# Altium PCB DM0249.PcbDoc (part 2 of 2)
Units mm, origin at the board's own origin, x right, y up, seen from the top; angles counter-clockwise.
Board outline 25 x 23.86 mm, 4 copper layers (Top Copper, Signal Layer 1, Layer 1, Bottom Layer), stack 1.602 mm thick; 50 components, 26 nets, 168 pads, 81 vias.
Unrouted connection lines stored in the file: 43.
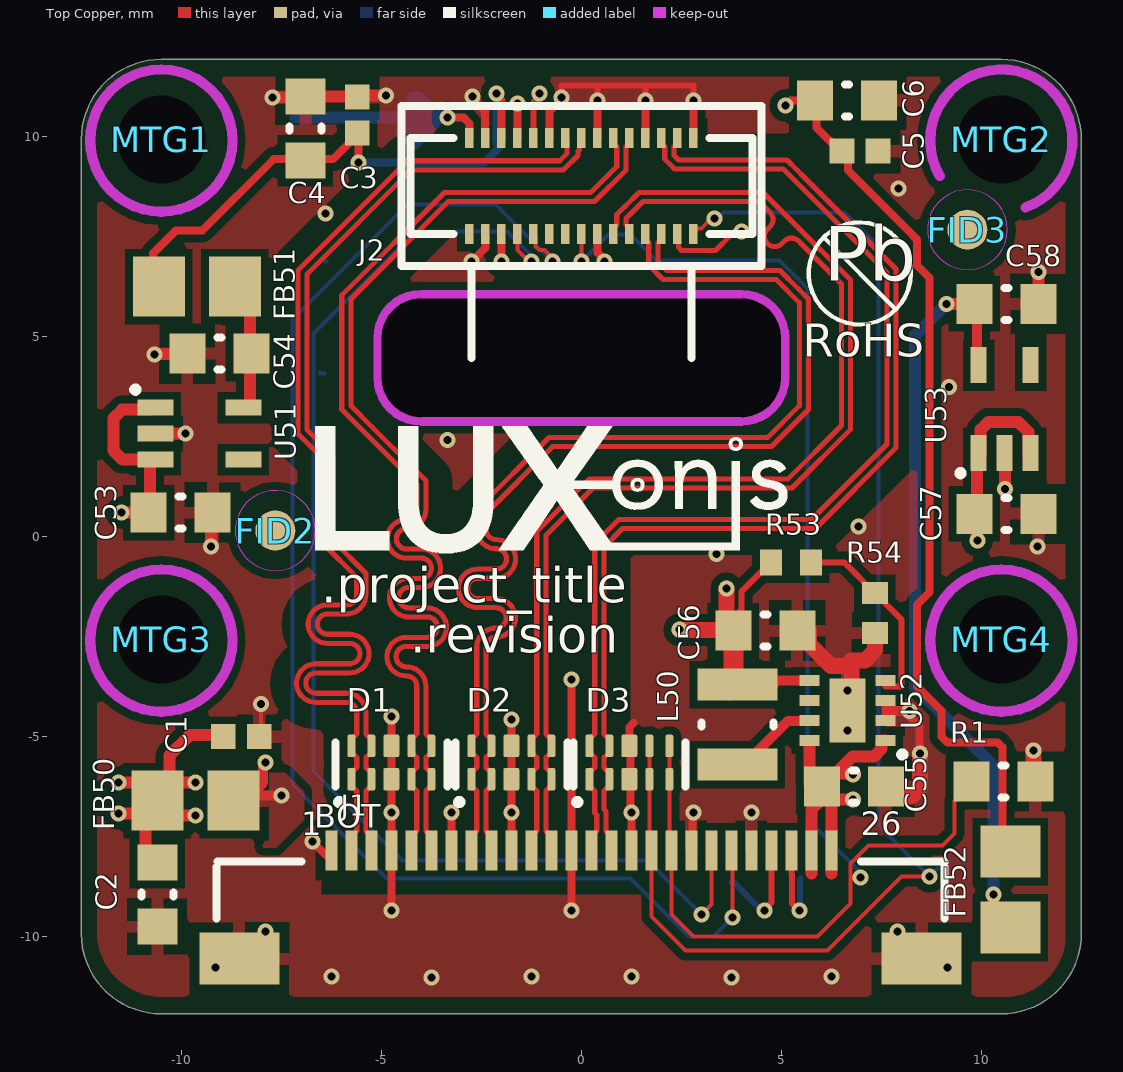
[diagram p0: Top Copper view]

## Via types
v1: diameter 0.4, hole 0.2, Top Copper to Bottom Layer, tented both sides, 79 vias
v2: diameter 0.3, hole 0.203, Top Copper to Bottom Layer, 2 vias

## Nets (pads, with @x,y where several pads share a name; then routed paths per layer and width w, separated by ;. In a path a pad name is that pad's centre, name@x,y a point inside that pad or via, vN(x,y) a via of type N, cw(c..) or ccw(c..) an arc to the next point about the centre after c; other vN are vias at no path point) (continued)
GND: (continued)
  Top Copper w0.2: v1(-6.725,-7.625) J1.1@-6.371,-7.979 ; v1(-4.75,-9.35) -4.75,-8.425 J1.4 v1(-4.75,-6.9) D1.3 D1.8 v1(-4.75,-4.5) ; J1.7 v1(-3.25,-6.9) ; v1(-2.75,6.875) -2.741,6.875 -2.4,7.216 -2.4,7.559 J2.17@-2.41,7.569 ; v1(-2.725,11) -2.725,10.946 -2.41,10.631 -2.41,10.341 ; -2.41,10.486 -2.41,10.341 ; J2.14 -2.41,9.98 -2.41,10.341 ; -2.4,10.331 -2.41,10.341 ; J1.10 v1(-1.75,-6.9) D2.3 D2.8 v1(-1.75,-4.577) ; J2.12 -1.6,10.331 v1(-1.6,10.825) ; J2.10 -0.79,9.98 -0.79,10.341 -0.79,10.631 -0.5,10.921 v1(-0.5,10.975) ; v1(-0.25,-9.35) -0.25,-8.425 ; -0.25,-8.887 -0.25,-8.425 ; v1(-0.25,-3.568) J1.13 -0.25,-8.425 ; J2.7 0.4,10.331 v1(0.4,10.9) ; J2.24@0.41,7.64 0.41,7.341 0.41,7.092 0.58,6.922 v1(0.58,6.875) ; J1.16 v1(1.25,-6.9) 1.225,-6.875 1.225,-5.258 D3.8 1.2,-4.767 1.306,-4.661 ; J2.4 1.6,10.331 v1(1.6,10.9) ; J1.19 2.775,-7.825 2.775,-6.925 v1(2.8,-6.9) ; J2.1 2.8,10.331 v1(2.8,10.9) ; U52.2 U52.3 ; v1@8.2,-4.5 8.45,-4.75 v1@8.45,-5.475
  Top Copper w0.25: 7.625,-4.36 v1@8.23,-4.36
  Top Copper w0.3: U51.2@-10.75,2.573 -10.749,2.574 v1(-9.9,2.575) v1(-9.9,2.575) ; v1(-10.675,4.55) -10.664,4.561 -9.824,4.561 C54.1@-9.812,4.573 ; v1(-9.254,-0.25) -9.254,0.258 -9.425,0.429 C53.1@-9.254,0.6 ; v1(-7.725,10.975) -6.914,10.975 -6.897,10.958 -6.858,10.997 -5.641,10.997 -5.602,11.037 -5.59,11.025 v1(-4.886,11.025) ; U53.2 10.592,2.075 v1(10.592,1.194) ; v1@11.379,6.615 11.425,6.569 C58.1 ; v1@11.406,6.565 11.406,6.596 v1(11.425,6.615)
  Top Copper w0.4: C56.1@5.695,-2.339 5.695,-2.688 6.247,-3.24 6.745,-3.24 ; U52.9@6.58,-4.419 6.75,-4.25 6.75,-3.1 ; U52.9@6.75,-3.85 6.75,-3.1 ; R54.1@7.346,-2.534 7.346,-2.836 7.082,-3.1 6.75,-3.1 ; C55.1@7.64,-6.502 8.243,-6.502 8.465,-6.28 v1(8.465,-5.427) ; v1(11.3,-5.35) 11.3,-6.113 R1.2@11.312,-6.125
  other v1: -3.75,-11.025 3.75,-11.025 -6.25,-11 -1.25,-11 1.25,-11 6.25,-11 -9.15,-10.775 9.15,-10.775 -7.9,-9.875 7.9,-9.875 4.25,-6.9 8.205,-4.36 3.378,-0.432 11.401,-0.25 6.934,0.254 -3.35,2.41 9.195,3.735 -6.4,8.073 7.925,8.7
  other v2: 6.65,-4.85 6.65,-3.85
I2C_SCL: J1.21 J2.20 TP4.1 | length 35.4
  Top Copper w0.1: J2.20 -1.14,7.51 -1.14,7.253 -1.05,7.163 -0.921,7.163 -0.833,7.075 ; -0.833,7.074 -0.715,6.956 v1(-0.715,6.875) ; J1.21 3.775,-7.875 3.775,-8.45 v1(3.775,-9.525)
  Bottom Layer w0.1: TP4.1@-6.4,6.875 TP4.1 ; v1(-0.715,6.875) -2.14,8.3 -4.35,8.3 -7.225,5.425 -7.225,-6.2 -4.875,-8.55 1.225,-8.55 2.675,-10 3.3,-10 v1(3.775,-9.525)
I2C_SDA: J1.20 J2.19 TP3.1 | length 32.1
  Top Copper w0.1: J2.19 -1.6,7.163 -1.312,6.875 v1(-1.25,6.875) ; v1(3,-9.45) 3.25,-9.2 3.25,-8.425 ; 3.25,-8.812 3.25,-8.425 ; J1.20 3.25,-8.425
  Bottom Layer w0.1: TP3.1@-6.55,4.1 -6.525,4.075 TP3.1@-6.425,4.075 ; v1(-1.25,6.875) -1.25,7.02 -1.855,7.625 -4.15,7.625 -6.7,5.075 -6.7,-5.875 -4.475,-8.1 1.65,-8.1 v1(3,-9.45)
MIPI_C_N: D2.2 D2.9 J1.9 J2.28 | length 28.2
  Top Copper w0.127: J1.9 -2.25,-7.5 -2.386,-7.364 -2.386,-6.361 -2.311,-6.287 -2.287,-6.287 -2.25,-6.25 D2.2 -2.25,-5.885 -2.287,-5.849 -2.311,-5.849 -2.386,-5.774 -2.386,-5.526 -2.311,-5.452 -2.287,-5.452 -2.25,-5.415 D2.9 -2.25,-5.05 -2.287,-5.014 -2.311,-5.014 -2.386,-4.939 -2.386,-4.35 -2.386,-2.769 cw(c-2.132,-2.769) -2.132,-2.515 ccw(c-2.132,-2.032) -2.132,-1.55 -2.587,-1.55 cw(c-2.587,-1.296) -2.587,-1.042 -2.122,-1.042 ccw(c-2.122,-0.559) -2.122,-0.076 -2.132,-0.076 cw(c-2.132,0.178) -2.386,0.178 -2.386,0.355 -2.386,0.578 -0.715,2.249 4.754,2.249 5.679,3.174 5.679,5.942 5.424,6.196 4.966,6.654 2.135,6.654 1.914,6.875 1.914,7.344 2,7.43 J2.28
MIPI_C_P: D2.1 D2.10 J1.8 J2.27 | length 28.2
  Top Copper w0.127: J1.8 -2.75,-7.5 -2.614,-7.364 -2.614,-6.361 -2.689,-6.287 -2.713,-6.287 -2.75,-6.25 D2.1 -2.75,-5.885 -2.713,-5.849 -2.689,-5.849 -2.614,-5.774 -2.614,-5.526 -2.689,-5.452 -2.713,-5.452 -2.75,-5.415 D2.10 -2.75,-5.05 -2.713,-5.014 -2.689,-5.014 -2.614,-4.939 -2.614,-4.35 -2.614,-2.769 cw(c-2.132,-2.769) -2.132,-2.286 ccw(c-2.132,-2.032) -2.132,-1.778 -2.587,-1.778 cw(c-2.587,-1.296) -2.587,-0.813 -2.122,-0.813 ccw(c-2.122,-0.559) -2.122,-0.305 -2.132,-0.305 cw(c-2.132,0.178) -2.614,0.178 -2.614,0.355 -2.614,0.673 -0.81,2.477 4.659,2.477 5.45,3.269 5.45,5.847 4.872,6.425 2.041,6.425 1.686,6.78 1.686,7.344 1.6,7.43 J2.27
MIPI_D0_N: D1.5 D1.6 J1.6 J2.5 | length 28.2
  Top Copper w0.127: J1.6 -3.75,-7.5 -3.886,-7.364 -3.886,-6.361 -3.811,-6.287 -3.786,-6.287 -3.75,-6.25 D1.5 -3.75,-5.885 -3.786,-5.849 -3.811,-5.849 -3.886,-5.774 -3.886,-5.526 -3.811,-5.452 -3.786,-5.452 -3.75,-5.415 D1.6 -3.75,-5.05 -3.786,-5.014 -3.811,-5.014 -3.886,-4.939 -3.886,-3.916 -3.886,-3.738 ccw(c-4.368,-3.738) -4.368,-3.256 -4.378,-3.256 cw(c-4.378,-3.002) -4.378,-2.748 -3.851,-2.748 ccw(c-3.851,-2.265) -3.851,-1.783 -4.315,-1.783 cw(c-4.315,-1.529) -4.315,-1.275 -4,-1.275 ccw(c-4,-0.792) -4,-0.309 -4.368,-0.309 cw(c-4.368,-0.055) -4.368,0.199 ccw(c-4.368,0.681) -3.886,0.681 -3.886,1.396 -4.214,1.724 -5.224,2.734 -5.76,3.27 -5.76,5.94 -3.325,8.375 0.331,8.375 1.114,9.159 1.114,9.744 1.2,9.83 J2.5
MIPI_D0_P: D1.4 D1.7 J1.5 J2.6 | length 28.2
  Top Copper w0.127: J1.5 -4.25,-7.5 -4.114,-7.364 -4.114,-6.361 -4.189,-6.287 -4.214,-6.287 -4.25,-6.25 D1.4 -4.25,-5.885 -4.214,-5.849 -4.189,-5.849 -4.114,-5.774 -4.114,-5.526 -4.189,-5.452 -4.214,-5.452 -4.25,-5.415 D1.7 -4.25,-5.05 -4.214,-5.014 -4.189,-5.014 -4.114,-4.939 -4.114,-3.916 -4.114,-3.738 ccw(c-4.368,-3.738) -4.368,-3.484 -4.378,-3.484 cw(c-4.378,-3.002) -4.378,-2.519 -3.851,-2.519 ccw(c-3.851,-2.265) -3.851,-2.011 -4.315,-2.011 cw(c-4.315,-1.529) -4.315,-1.046 -4,-1.046 ccw(c-4,-0.792) -4,-0.538 -4.368,-0.538 cw(c-4.368,-0.055) -4.368,0.427 ccw(c-4.368,0.681) -4.114,0.681 -4.114,1.301 -4.537,1.724 -5.463,2.65 -5.989,3.175 -5.989,6.035 -3.42,8.604 0.236,8.604 0.886,9.253 0.886,9.744 0.8,9.83 J2.6
MIPI_D1_N: D2.4 D2.7 J1.11 J2.26 | length 28.2
  Top Copper w0.127: J1.11 -1.25,-7.5 -1.114,-7.364 -1.114,-6.845 -1.114,-6.361 -1.189,-6.287 -1.214,-6.287 -1.25,-6.25 D2.4 -1.25,-5.885 -1.214,-5.849 -1.189,-5.849 -1.114,-5.774 -1.114,-5.526 -1.189,-5.452 -1.214,-5.452 -1.25,-5.415 D2.7 -1.25,-5.05 -1.214,-5.014 -1.189,-5.014 -1.114,-4.939 -1.114,0.128 0.2,1.443 5.17,1.443 6.505,2.778 6.505,6.317 5.48,7.341 5.435,7.386 ccw(c5.256,7.207) 5.076,7.386 5.013,7.323 cw(c4.834,7.503) 4.654,7.323 cw(c4.834,7.503) 4.654,7.683 4.717,7.745 ccw(c4.537,7.925) 4.717,8.105 4.447,8.375 4.109,8.375 1.539,8.375 1.193,8.029 1.189,8.029 1.114,7.954 1.114,7.796 1.2,7.71 J2.26
MIPI_D1_P: D2.5 D2.6 J1.12 J2.25 | length 28.2
  Top Copper w0.127: J1.12 -0.75,-7.5 -0.886,-7.364 -0.886,-6.939 -0.886,-6.361 -0.811,-6.287 -0.786,-6.287 -0.75,-6.25 D2.5 -0.75,-5.885 -0.786,-5.849 -0.811,-5.849 -0.886,-5.774 -0.886,-5.526 -0.811,-5.452 -0.786,-5.452 -0.75,-5.415 D2.6 -0.75,-5.05 -0.786,-5.014 -0.811,-5.014 -0.886,-4.939 -0.886,0.033 0.295,1.214 5.265,1.214 6.734,2.683 6.734,6.411 5.27,7.875 4.541,8.604 1.445,8.604 1.098,8.257 1.094,8.257 0.886,8.049 0.886,7.796 0.8,7.71 J2.25
MIPI_D2_N: D1.2 D1.9 J1.3 J2.8 | length 28.2
  Top Copper w0.127: J1.3 -5.25,-7.5 -5.386,-7.364 -5.386,-6.361 -5.311,-6.287 -5.287,-6.287 -5.25,-6.25 D1.2 -5.25,-5.885 -5.287,-5.849 -5.311,-5.849 -5.386,-5.774 -5.386,-5.526 -5.311,-5.452 -5.287,-5.452 -5.25,-5.415 D1.9 -5.25,-5.05 -5.287,-5.014 -5.311,-5.014 -5.386,-4.939 -5.386,-4.577 -5.386,-4.399 ccw(c-5.868,-4.399) -5.868,-3.916 -6.635,-3.916 cw(c-6.635,-3.662) -6.635,-3.408 -5.789,-3.408 ccw(c-5.789,-2.926) -5.789,-2.443 -6.346,-2.443 cw(c-6.346,-2.189) -6.346,-1.935 -5.868,-1.935 ccw(c-5.868,-1.452) -5.386,-1.452 -5.386,-0.922 -6.204,-0.104 -6.204,0.6 -6.204,1.774 -6.204,2.019 -6.858,2.672 -6.858,6.559 -4.25,9.168 -0.445,9.168 -0.086,9.527 -0.086,9.636 -0.046,9.675 -0.046,9.924 J2.8
MIPI_D2_P: D1.1 D1.10 J1.2 J2.9 | length 28.1
  Top Copper w0.127: J1.2 -5.75,-7.5 -5.614,-7.364 -5.614,-6.361 -5.689,-6.287 -5.714,-6.287 -5.75,-6.25 D1.1 -5.75,-5.885 -5.714,-5.849 -5.689,-5.849 -5.614,-5.774 -5.614,-5.526 -5.689,-5.452 -5.714,-5.452 -5.75,-5.415 D1.10 -5.75,-5.05 -5.714,-5.014 -5.689,-5.014 -5.614,-4.939 -5.614,-4.577 -5.614,-4.399 ccw(c-5.868,-4.399) -5.868,-4.145 -6.635,-4.145 cw(c-6.635,-3.662) -6.635,-3.18 -5.789,-3.18 ccw(c-5.789,-2.926) -5.789,-2.672 -6.346,-2.672 cw(c-6.346,-2.189) -6.346,-1.706 -5.868,-1.706 ccw(c-5.868,-1.452) -5.614,-1.452 -5.614,-1.017 -6.433,-0.198 -6.433,0.6 -6.433,1.68 -6.433,1.924 -7.087,2.578 -7.087,6.654 -4.345,9.396 -0.54,9.396 -0.354,9.582 -0.354,9.924 J2.9
MIPI_D3_N: D3.2 D3.9 J1.15 J2.2 | length 28
  Top Copper w0.127: J1.15 0.75,-7.5 0.614,-7.364 0.614,-6.87 0.564,-6.82 0.564,-6.361 0.639,-6.287 0.664,-6.287 0.7,-6.25 D3.2 0.7,-5.885 0.664,-5.849 0.639,-5.849 0.564,-5.774 0.564,-5.526 0.639,-5.452 0.664,-5.452 0.7,-5.415 D3.9 0.7,-5.05 0.664,-5.014 0.639,-5.014 0.564,-4.939 0.564,-0.266 1.03,0.2 5.852,0.2 7.869,2.217 7.869,6.69 5.554,9.004 5.4,9.159 5.142,9.417 2.427,9.417 2.314,9.53 2.314,9.744 2.4,9.83 J2.2
MIPI_D3_P: D3.1 D3.10 J1.14 J2.3 | length 28
  Top Copper w0.127: J1.14 0.25,-7.5 0.386,-7.364 0.386,-6.964 0.336,-6.914 0.336,-6.361 0.261,-6.287 0.237,-6.287 0.2,-6.25 D3.1 0.2,-5.885 0.237,-5.849 0.261,-5.849 0.336,-5.774 0.336,-5.526 0.261,-5.452 0.237,-5.452 0.2,-5.415 D3.10 0.2,-5.05 0.237,-5.014 0.261,-5.014 0.336,-4.939 0.336,-0.171 0.935,0.429 5.757,0.429 7.64,2.312 7.64,6.595 5.047,9.188 2.332,9.188 2.265,9.255 2.086,9.435 2.086,9.744 2,9.83 J2.3
NetC54_2: C54.2 FB51.1 U51.5 | length 3.2
  Top Copper w0.3: FB51.1@-8.51,6.248 -8.288,6.027 -8.288,4.573 -8.288,3.273 -8.338,3.223 U51.5@-8.35,3.223
NetC58_2: C58.2 FB52.1 U53.5 | length 19.3
  Top Copper w0.25: C58.2@9.863,5.815 9.897,5.781 9.897,4.419 U53.5@9.932,4.385
  Top Copper w0.3: v1(9.125,5.815) C58.2@9.863,5.815 ; C58.2 C58.2@9.825,5.865 ; v1(10.3,-8.95) 10.3,-9.503 10.722,-9.925 FB52.1@10.725,-9.925
  Bottom Layer w0.3: v1(9.125,5.815) 8.345,5.035 8.345,-3.77 10.3,-5.725 v1(10.3,-8.95)
NetL50_1: L50.1 U52.7 | length 2.1
  Top Copper w0.25: L50.1@3.988,-5.787 5.17,-4.605 U52.7@5.618,-4.605
NetR53_1: R53.1 R54.2 U52.4 | length 4.7
  Top Copper w0.15: R53.1@5.999,-0.643 6.571,-0.643 R54.2 8,-2.071 8,-3.75 7.604,-3.75 7.595,-3.74
V_DCDC: C56.2 FB50.1 L50.2 R53.2 U52.5 | length 10.5
  Top Copper w0.15: C56.2@3.642,-2.192 4,-1.833 4,-1.38 R53.2
  Top Copper w0.25: FB50.1@-8.6,-6.6 FB50.1@-8.4,-6.6 ; FB50.1@-8.375,-6.625 -8.45,-6.7 -8.6,-6.7 FB50.1 FB50.1@-8.4,-6.6 ; v1@-7.875,-5.6 -7.954,-5.679 -7.954,-6.153 FB50.1@-8.275,-6.475 ; v1(-7.5,-6.475) FB50.1@-8.275,-6.475 ; L50.2@3.9,-3.664 L50.2@4.579,-3.664 ; L50.2@4.648,-3.848 4.896,-3.6 U52.5@5.765,-3.6 ; FB50.1@-8.4,-6.6 -8.338,-6.538 FB50.1@-8.275,-6.475 ; FB50.1@-8.4,-6.6 FB50.1@-8.275,-6.475
  Top Copper w0.4: v1(2.45,-2.325) 2.45,-2.339 C56.2@3.495,-2.339 ; C56.2@3.625,-2.208 v1(3.625,-1.3)
  Top Copper w0.5: L50.2@3.704,-3.85 3.854,-3.7 L50.2 ; L50.2@3.704,-3.664 3.8,-3.568 C56.2
  other v1: -7.9,-5.65
VDD_5V: C53.2 C55.2 C57.2 J1.25 J1.26 U51.1 U51.3 U52.1 U52.8 U53.1 U53.3 | length 55.7
  Top Copper w0.3: v1(-11.5,0.6) -10.778,0.6 -10.778,1.895 -10.808,1.925 -11.475,1.925 -11.7,2.15 -11.7,2.95 -11.477,3.173 -10.8,3.173 U51.1@-10.75,3.223 ; 5.71,-5.242 5.71,-6.192 5.899,-6.381 5.766,-6.513 C55.2@5.899,-6.513 ; 5.75,-8.425 J1.25 5.75,-6.827 C55.2@6.016,-6.561 ; C55.2@5.874,-6.263 C55.2@6.007,-6.263 ; C55.2@5.874,-6.131 C55.2@6.007,-6.263 ; C55.2@6.203,-6.076 C55.2@6.352,-5.927 ; 6.25,-8.425 6.25,-6.293 C55.2@6.279,-6.263 ; C55.2@6.279,-5.927 C55.2@6.352,-5.927 ; v1(6.79,-6.577) 6.279,-6.577 C55.2@6.279,-6.263 ; v1@6.79,-5.927 C55.2@6.352,-5.927 ; U52.1 7.52,-5.1 7.51,-5.11 7.51,-5.308 7.315,-5.502 6.777,-5.502 C55.2@6.352,-5.927 ; v1(9.9,-0.1) 9.882,-0.082 9.882,0.553 9.894,0.565 9.894,1.947 9.932,1.985 9.982,2.035 9.982,2.672 10.175,2.865 10.925,2.865 11.182,2.608 11.182,2.035 U53.3@11.232,1.985 ; C55.2@6.007,-6.263 C55.2@6.279,-6.263
  Layer 1 w0.3: v1(-11.5,0.6) -9.425,0.6 -8.25,-0.575 -8.25,-3.514 -8.725,-3.989 -8.725,-7.425 -7.85,-8.3 5.38,-8.3 6.8,-6.88 6.8,-6.25 7.45,-5.6 7.45,-0.65 8,-0.1 v1(9.9,-0.1)
  other v1: 6.79,-5.952
pads on no net: FID1.1 FID2.1 FID3.1 FID4.1 J2.16 J2.21 J2.22 MTG1.1 MTG2.1 MTG3.1 MTG4.1 U51.4 U52.6 U53.4

## Polygon pours and split planes (outlines as drawn)
GND on Bottom Layer "GND_ML1" (solid, pour order 12): -10.5,-11.5 cw(c-10.5,-9.9) -12.1,-9.9 -12.1,10 cw(c-10.6,10) -10.6,11.5 10.6,11.5 cw(c10.6,10) 12.1,10 12.1,-10 cw(c10.6,-10) 10.6,-11.5
1.05V on Bottom Layer "1.05V" (solid, pour order 2): -11.125,-9.175 -11.775,-8.525 -11.775,-5.45 -11.05,-4.725 -9.75,-4.225 -8.925,-3.5 -9.075,-1.465 -9.075,8.425 -6.8,11.225 -3.3,11.225 -2.65,10.575 -2.65,9.875 -3.05,9.475 -5.875,9.475 -7.375,7.975 -7.375,-8.4 -8.125,-9.15
GND on Top Copper "GND_ML1" (solid, pour order 14): -10.5,-11.5 cw(c-10.5,-9.9) -12.1,-9.9 -12.1,10 cw(c-10.6,10) -10.6,11.5 10.6,11.5 cw(c10.6,10) 12.1,10 12.1,-10 cw(c10.6,-10) 10.6,-11.5
V_DCDC on Top Copper "V_DC_DC" (solid, pour order 4): -8.2,-6.75 -8.2,-6.225 -7.875,-5.9 -7.4,-5.9 -6.925,-6.375 -6.925,-7.075 -7.625,-7.775 -8.05,-7.775
GND on Layer 1 "GND_ML1" (solid, pour order 16): -10.5,-11.5 cw(c-10.5,-9.9) -12.1,-9.9 -12.1,10 cw(c-10.6,10) -10.6,11.5 10.6,11.5 cw(c10.6,10) 12.1,10 12.1,-10 cw(c10.6,-10) 10.6,-11.5
2.8V on Layer 1 "2.8V" (solid, pour order 10): -2.075,6.85 -2.325,7.1 -2.325,9.4 -1.375,10.35 -1.375,11.125 -1.138,11.362 5.113,11.363 5.5,10.975 5.5,9.85 5,9.35 0.325,9.35 -1.575,7.45 -1.575,7.1 -1.825,6.85
V_DCDC on Layer 1 "NONET_L-01_P-001" (solid, pour order 6): -8.09,-7.531 -8.09,-5.832 -7.7,-5.442 -0.949,-5.442 1.502,-2.991 1.5,-2.99 1.5,-2.057 2.799,-0.758 3.919,-0.758 4.509,-1.348 4.509,-5.058 4.214,-5.058 2.56,-6.712 -6.312,-6.712 -7.142,-7.542 -8.09,-7.542
GND on Signal Layer 1 "GND_ML1" (solid, pour order 8): -10.5,-11.5 cw(c-10.5,-9.9) -12.1,-9.9 -12.1,10 cw(c-10.6,10) -10.6,11.5 10.6,11.5 cw(c10.6,10) 12.1,10 12.1,-10 cw(c10.6,-10) 10.6,-11.5

## Keep-outs
Signal Layer 1:
  circle w0.254: c10.5,9.925 r1.811
Layer 1:
  circle w0.254: c10.5,9.925 r1.811
Bottom Layer:
  circle w0.254: c10.5,9.925 r1.811
Keep-Out Layer:
  circle w0.254: c10.5,-2.6 r1.778
  circle w0.254: c-10.5,9.9 r1.778
  circle w0.254: c-10.5,-2.6 r1.778
  lines w0.254: 8.96,9.011 cw(c10.5,9.9) 11.108,8.229

## Silkscreen, mask and mechanical layers (free items; w line width, h text height)
Top Overlay:
  drawing of 9 lines, arcs and shapes, not listed
  text "Pb" at 6.062,5.951 h2.34
  text "RoHS" at 5.537,4.216 h1.4
  text ".project_title" at -6.497,-1.95 h1.52
  text ".revision" at -4.275,-3.2 h1.52
  text "BOT" at -6.673,-7.483 h1
Bottom Overlay:
  drawing of 7 lines, arcs and shapes, not listed
  text "2V8" at 6,9.7 h1.02 r270
  text "1V05" at -5.439,8.533 h1.02 r270
  text "1V8" at -1.4,8.2 h1.02 r270
  text "SCL" at -8.1,6.1 h1.02 r270
  text "SDA" at -8.3,3.3 h1.02 r270
  text "CAUX2" at 5.3,-7.6 h1.02 r270
  text "CRST" at 6.6,-7.6 h1.02 r270
  text "CCLK" at 8.2,-7.6 h1.02 r270
  text "CAUX1" at 2.9,-8.9 h1.02
  text ".revision" at -11.1,-9.855 h1.52 r270
  text ".project_title" at -9.703,-9.855 h1.52 r270
  text "GND" at 1,-10.2 h1.02
Board:
  lines w0.05: -12.5,-9.931 ccw(c-10.5,-9.931) -10.5,-11.931 10.5,-11.931 ccw(c10.5,-9.931) 12.5,-9.931 12.5,9.931 ccw(c10.5,9.931) 10.5,11.931 -10.5,11.931 ccw(c-10.5,9.931) -12.5,9.931 -12.5,-9.931

## Text inside footprints (layer, text, board x,y; h text height)
J1: Top Overlay "1" at -7,-7.672 h1; Top Overlay "26" at 6.989,-7.672 h1